# Altium PCB PDC.PcbDoc (part 2 of 3)
Units mil, origin at the board's own origin, x right, y up, seen from the top; angles counter-clockwise.
Board outline 5200.04 x 5000 mil, 4 copper layers (Top Layer, Signal Layer 1, Signal Layer 2, Bottom Layer), stack 30.634 mil thick; 172 components, 174 nets, 838 pads, 390 vias.
Unrouted connection lines stored in the file: 157.
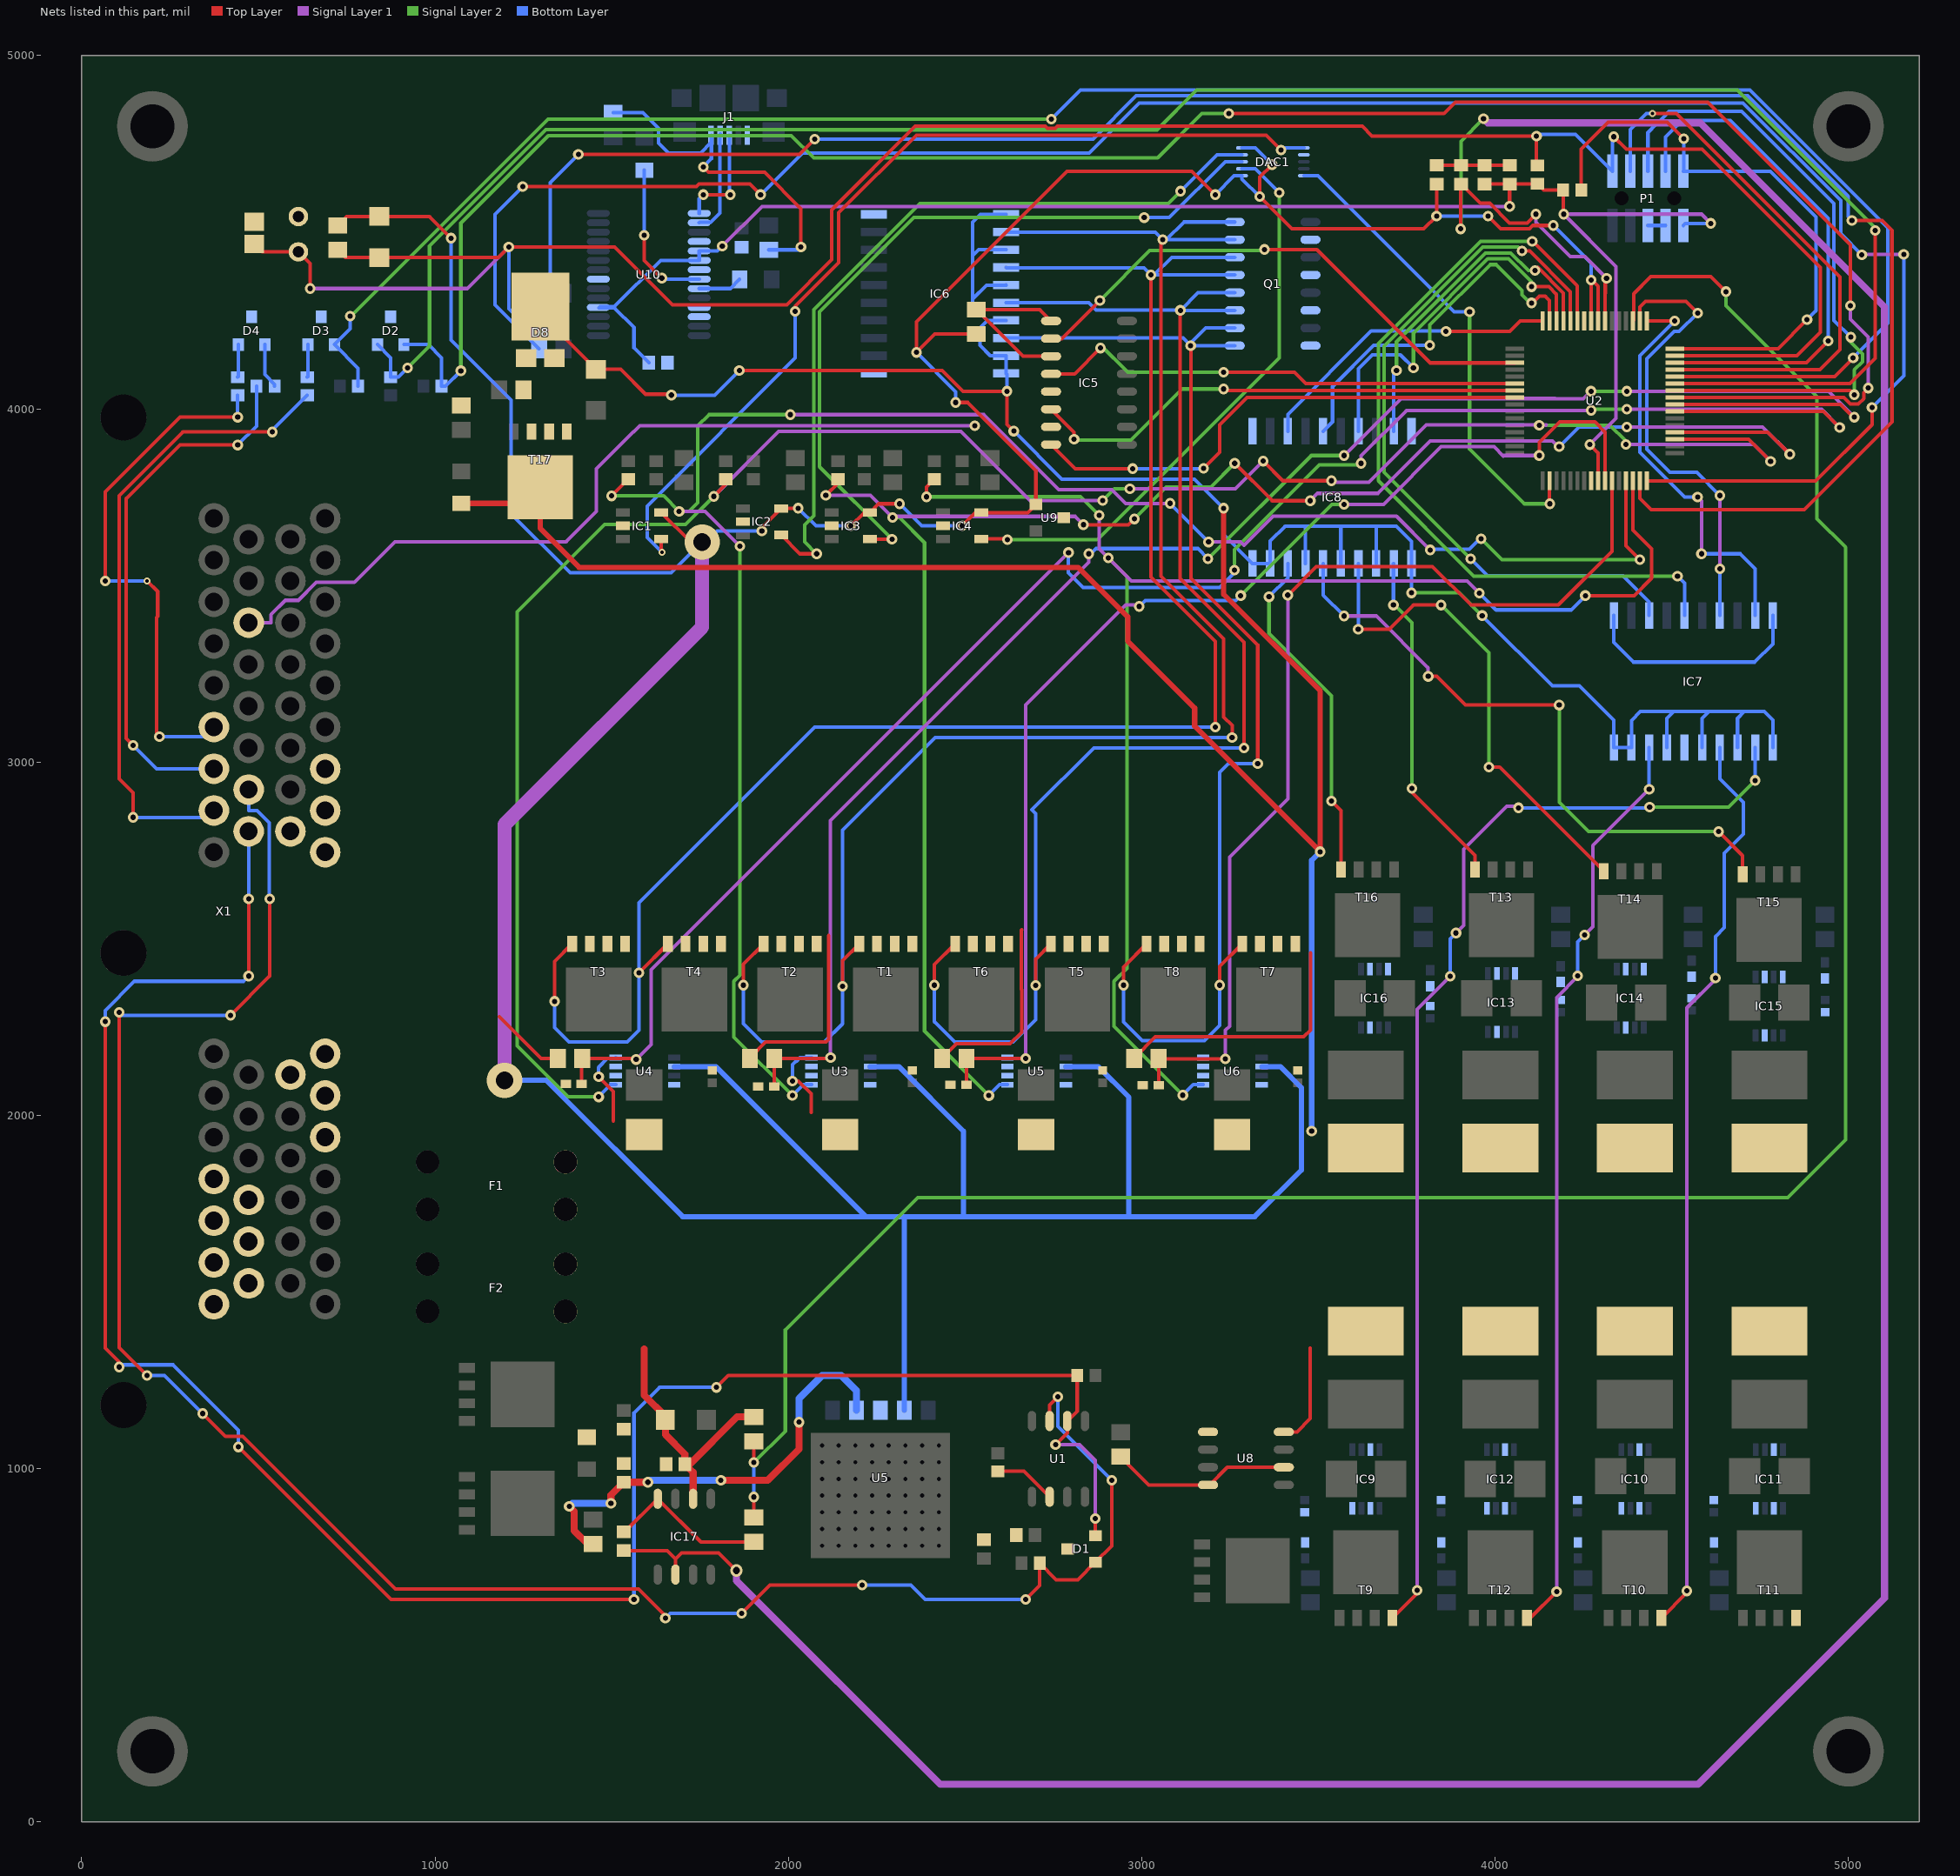
[diagram p4: the nets of this part, all layers, seen from the top]

## Via types
v1: diameter 30, hole 15, Top Layer to Bottom Layer, 376 vias
v2: diameter 96, hole 48, Top Layer to Bottom Layer, 6 vias
v3: diameter 20, hole 10, Top Layer to Bottom Layer, 3 vias
v4: diameter 100, hole 50, Top Layer to Bottom Layer, 2 vias
v5: diameter 96, hole 46, Top Layer to Bottom Layer, 1 vias
v6: diameter 35, hole 20, Top Layer to Bottom Layer, 1 vias
v7: diameter 40, hole 20, Top Layer to Bottom Layer, 1 vias

## Nets (pads, with @x,y where several pads share a name; then routed paths per layer and width w, separated by ;. In a path a pad name is that pad's centre, name@x,y a point inside that pad or via, vN(x,y) a via of type N, cw(c..) or ccw(c..) an arc to the next point about the centre after c; other vN are vias at no path point)
5VREF: C6.2 C22.2 IC17.6 U2.7 | length 10292.7
  Top Layer w10: C22.2@1534,768.1 1656.64,768.1 1680.26,744.48 ; IC17.6@1680.26,700.19 1680.26,744.48 ; v6(1852.96,711.65) 1802.59,762.01 1697.79,762.01 1680.26,744.48 ; v1(3902.26,4509.41) 3902.26,4635.63 C6.2@3903.16,4636.53 3957.58,4582.1 3984.98,4582.1 4040.72,4526.36 4090.65,4526.36 v1(4115.42,4551.13) ; U2.7@4311.42,4248.99 4311.42,4327.3 4311.73,4327.61 ; 4311.73,4327.3 4311.73,4327.61 ; v1@4316.21,4370.08 v1(4315.4,4369.27) 4311.73,4365.6 4311.73,4327.61
  Signal Layer 1 w10: v1(4115.42,4551.13) 4115.42,4527.99 4212.63,4430.78 4253.9,4430.78 v1(4315.4,4369.27)
  Signal Layer 1 w20: v6(1852.96,711.65) 1852.96,683.07 2429.61,106.42 4574.63,106.42 5102.09,633.88 5102.09,4288.05 4580.59,4809.56 3978.48,4809.56 v1(3966.93,4821.11)
  Signal Layer 2 w10: v1(3902.26,4509.41) 3903.39,4510.53 3903.39,4757.57 v1(3966.93,4821.11)
+5: C4.2 C19.2 D6.2 DAC1.1 DAC1.5 IC1.5 IC2.5 IC3.5 IC4.5 IC9.2 IC10.2 IC11.2 IC12.2 IC13.2 IC14.2 IC15.2 IC16.2 R16.2 R63.1 R65.2 U2.8 U2.9 U3.2 U4.2 U5.2 U5.4@2328.09,1164.95 U6.2 U9.1 | length 15112.1
  Top Layer w10: R65.2@724.37,4518.87 749.97,4544.46 D6.2@842.48,4544.46 984.3,4544.46 v1(1045.52,4483.24) ; IC1.5@1640.36,3706.47 1723.72,3623.1 v4(1755.74,3623.1) ; v1(1924.89,3654.59) 1924.89,3663.73 IC2.5@1979.25,3718.1 2027.16,3718.1 v1(2027.9,3718.84) ; v1(2176.77,3669.07) 2214.17,3706.47 IC3.5@2230.91,3706.47 2255.78,3731.34 v1(2314.57,3731.34) ; v1@2469.53,4018.06 v1(2473.57,4018.06) 2507.5,4018.06 2700.31,3825.25 U9.1@2700.31,3729.4 2677.38,3706.47 IC4.5@2545.87,3706.47 2529.13,3706.47 v1(2491.73,3669.07) ; R16.2@2532.01,4211.98 2414.37,4211.98 v1(2362.2,4159.81) 2362.2,4246.43 2788.51,4672.73 3141.4,4672.73 v1(3207.82,4606.3) ; v1(3368.8,4691.38) 3333.47,4656.04 v1(3333.47,4600.88) 3424.94,4509.41 3797.71,4509.41 v1(3834.26,4545.96) C4.2@3834.26,4636.53 ; v1(3979.76,4545.96) 4015.85,4509.86 4097.48,4509.86 4106.8,4519.18 v1(4164.97,4519.18) ; U2.9@4272.05,4248.99 v1(4272.05,4364.65) 4273.9,4364.65 4291.73,4346.82 U2.8@4291.73,4248.99
  Top Layer w20: v1(1379.63,893.21) 1393.64,879.2 1393.64,824.52 1431.36,786.8 R63.1@1446.99,786.8 ; v1(1497.74,901.96) 1497.74,925.34 C19.2@1534,961.61 v1(1602.33,961.61) ; v1(1808.94,967.04) 1941.7,967.04 2029.86,1055.2 v1(2029.86,1131.68)
  Signal Layer 1 w40: v4(1196.81,2099.3) 1196.81,2823.46 1755.74,3382.39 v4(1755.74,3623.1)
  Bottom Layer w10: v1(1045.52,4483.24) 1045.52,4194.53 1215.36,4024.69 1215.36,3702.64 1382.27,3535.73 1668.38,3535.73 v4(1755.74,3623.1) 1766.94,3623.1 1798.44,3654.59 v1(1924.89,3654.59) ; v1(1602.33,961.61) v1@1607.76,967.04 ; v1(2027.9,3718.84) 2077.67,3669.07 v1(2176.77,3669.07) ; v1(2314.57,3731.34) 2376.85,3669.07 v1(2491.73,3669.07) ; v1(2362.2,4159.81) 2473.57,4048.45 v1(2473.57,4018.06) ; v1(3207.82,4606.3) 3261.54,4660.02 DAC1.1@3283.58,4660.02 3283.58,4650.76 v1(3333.47,4600.88) ; DAC1.5@3283.58,4738.76 3321.42,4738.76 v1(3368.8,4691.38) ; v1(3834.26,4545.96) v1(3979.76,4545.96) ; v1(4164.97,4519.18) 4272.05,4412.11 v1(4272.05,4364.65)
  Bottom Layer w15: v4(1196.81,2099.3) 1314.92,2099.3 1700.89,1713.32 2219.52,1713.32 ; U4.2@1677,2138.09 1794.76,2138.09 2219.52,1713.32 ; U3.2@2231.12,2138.09 2312.72,2138.09 2495.39,1955.43 2495.39,1713.32 ; U5.4@2328.09,1164.95 2328.09,1713.32 ; U5.2@2785.25,2138.09 2876.82,2138.09 2963.14,2051.77 2963.14,1714.09 2962.38,1713.32 ; U6.2@3339.37,2138.09 3392.26,2138.09 3451.91,2078.44 3451.91,1967.46 ; 3451.89,1943.42 3451.89,1967.44 ; 3451.91,1943.4 3451.91,1845.27 3319.96,1713.32 2962.38,1713.32 ; 2219.52,1713.32 2328.09,1713.32 ; 2328.09,1713.32 2495.39,1713.32 ; 2495.39,1713.32 2962.38,1713.32
  Bottom Layer w20: v1(1379.63,893.21) 1388.38,901.96 v1(1497.74,901.96) ; v1@1607.76,967.04 v1(1808.94,967.04) ; v1(2029.86,1131.68) 2029.86,1198.69 2095.07,1263.9 2149.93,1263.9 2192.65,1221.18 U5.2@2192.65,1164.95
+12: "PTC Fuse1.2" "PTC Fuse2.2" "PTC Fuse3.2" "PTC Fuse4.2" "PTC Fuse5.2" "PTC Fuse6.2" "PTC Fuse7.2" "PTC Fuse8.2" C21.2 D5.1 D7.2 D8.3 F1.1 F2.1 IC6.11 IC6.13 IC6.15 IC6.17 IC6.19 IC6.20 IC7.11 IC7.13 IC7.15 IC7.17 IC7.19 IC7.20 IC8.11 IC8.13 IC8.15 IC8.17 IC8.19 IC8.20 IC17.2 LED2.1 R25.2 R28.2 R31.2 R34.2 R61.2 R64.1 T17.mb U3.8 U4.8 U5.8 U6.8 U8.4 U8.6 U8.8 | length 13081.2
  Top Layer w10: D8.3@1297.84,4289.53 1297.84,4269.49 D7.2@1455.32,4112.01 1525.11,4112.01 1595.62,4041.5 1666.34,4041.5 v1(1668.9,4038.94) ; v1(1463.06,2109.53) 1504.47,2068.12 1504.47,1984.55 ; v1(1861,4108.9) 2435.17,4108.9 2494.14,4049.92 v1(2618.44,4049.92) 2618.44,3956.36 v1(2637.8,3937.01) ; v1(2011.16,2096.99) 2028.09,2096.99 2064.13,2060.94 2064.13,2008.42 ; R64.1@2940.29,1033.89 3020.21,953.97 U8.4@3187.34,953.97 3191.99,953.97 3241.99,1003.97 U8.6@3401.91,1003.97 ; U8.8@3401.91,1103.97 3439.37,1103.97 3476.81,1141.41 3476.81,1341.63
  Top Layer w15: LED2.1@1074.41,3732.44 1252.56,3732.44 T17.mb@1297.84,3777.72 1297.84,3661.35 1407.9,3551.28 2820.24,3551.28 2960.27,3411.25 2960.27,3342.45 3149.61,3153.11 3149.61,3101.84 v1(3505.13,2746.32) 3505.13,3201.65 3231.52,3475.26 v1(3231.52,3718.84)
  Top Layer w20: 1592.28,1339.29 1591.88,1207.9 1651.72,1148.07 D5.1@1651.72,1138.18 1651.72,1096.19 1706.84,1041.07 C21.2@1706.84,1013.18 C21.2@1708.7,1011.32 ; IC17.2@1730.26,914.75 1730.26,989.75 C21.2@1708.7,1011.32 ; R61.2@1902.11,1146.45 1854.58,1146.45 1719.45,1011.32 C21.2@1708.7,1011.32
  Signal Layer 2 w10: v1(3763.2,3479.15) 3898.92,3479.15 v1(3963.29,3414.77)
  Bottom Layer w10: v1(1463.06,2109.53) 1463.06,2134.99 1462.09,2135.96 1487.49,2161.36 1508.89,2161.36 U4.8@1511.21,2163.68 ; v1(1668.9,4038.94) 1791.04,4038.94 v1(1861,4108.9) ; v1(2011.16,2096.99) 2011.16,2143.42 2020.49,2152.74 2022.14,2152.74 2033.08,2163.68 U3.8@2065.33,2163.68 ; IC6.17@2615.95,4250.43 2562.74,4250.43 ; IC6.15@2615.95,4350.43 2615.49,4349.97 2560.45,4349.97 2522.81,4312.33 2521.1,4312.33 ; IC6.13@2615.95,4450.43 2537.98,4450.43 2521.1,4433.56 ; IC6.11@2615.95,4550.43 2543.69,4550.43 2521.1,4527.84 2521.1,4433.56 ; v1(2618.44,4049.92) 2618.44,4097.94 IC6.20@2615.95,4100.43 IC6.19@2615.95,4150.43 2571.11,4150.43 2541.7,4179.84 2541.7,4229.39 2562.74,4250.43 ; v1(2637.8,3937.01) 2773.85,3800.96 3149.4,3800.96 v1(3231.52,3718.84) 3231.52,3644.18 IC8.20@3313.2,3562.5 IC8.19@3363.2,3562.5 3363.2,3625.75 3405.74,3668.3 3463.2,3668.3 ; IC8.17@3463.2,3562.5 3463.2,3668.3 ; IC8.15@3563.2,3562.5 3563.2,3668.3 ; IC8.13@3663.2,3562.5 3663.2,3667.47 3664.02,3668.3 ; v1(3763.2,3479.15) IC8.11@3763.2,3562.5 3763.2,3625.11 3720.01,3668.3 3664.02,3668.3 ; v1(3963.29,3414.77) 4161.99,3216.07 4238.7,3216.07 4335.93,3118.85 IC7.20@4335.93,3041.34 IC7.19@4385.93,3041.34 4385.93,3117.9 4411.23,3143.2 4505.22,3143.2 ; IC7.17@4485.93,3041.34 4485.93,3123.92 4505.22,3143.2 ; IC7.15@4585.93,3041.34 4585.93,3123.92 4605.22,3143.2 ; IC7.13@4685.93,3041.34 4685.93,3123.92 4705.22,3143.2 ; IC7.11@4785.93,3041.34 4785.93,3119.35 4762.09,3143.2 4705.22,3143.2 ; 2521.1,4312.33 2521.1,4433.56 ; 2521.1,4312.33 2521.1,4292.07 2562.74,4250.43 ; 3463.2,3668.3 3563.2,3668.3 ; 3563.2,3668.3 3664.02,3668.3 ; 4505.22,3143.2 4605.22,3143.2 ; 4605.22,3143.2 4705.22,3143.2
  Bottom Layer w15: v1(3480.89,1955.43) 3480.89,2722.08 v1(3505.13,2746.32)
BAT_SENSE: R61.1 R62.2 U2.3 | length 6768.8
  Top Layer w10: R62.2@1902.11,861.41 v1(1902.11,919.79) ; v1(1902.11,1017.43) R61.1@1902.11,1077.55 ; U2.3@4390.16,4248.99 4392.44,4251.27 4392.44,4325.83 4440.67,4374.07 4610.61,4374.07 4652.82,4331.85 v1(4653.01,4331.85)
  Signal Layer 2 w10: v1(1902.11,1017.43) 1991.33,1106.65 1991.33,1392.68 2365.68,1767.03 4828.12,1767.03 4991.64,1930.54 4991.64,3608.22 4911.01,3688.86 4911.01,4034.2 4653.01,4292.19 v1(4653.01,4331.85)
  Bottom Layer w10: v1(1902.11,919.79) v1(1902.11,1017.43)
CAN_N: D1.2 R13.1 U1.6 X1.A25 | length 6034.9
  Top Layer w10: v1(66.89,2265.37) 66.89,1340.86 106.26,1301.49 v1(106.26,1287.73) ; v1(443.39,1061.52) 874.99,629.92 v1(1562.96,629.92) ; v1(472.44,2394.49) v1(472.44,2613.19) ; v1(1796.24,1230.12) 1829.99,1263.86 R13.1@2817.34,1263.86 2817.34,1163.08 U1.6@2789.19,1134.93 2789.19,1101.62 v1(2755.91,1068.34) ; D1.2@2868.52,810.13 v1(2868.52,859.11)
  Signal Layer 1 w10: v1(2755.91,1068.34) 2824.04,1068.34 2868.52,1023.85 v1(2868.52,859.11)
  Bottom Layer w10: v1(66.89,2265.37) 66.89,2296.95 149.68,2379.73 457.69,2379.73 v1(472.44,2394.49) ; v1(106.26,1287.73) 112.43,1293.9 258.26,1293.9 443.39,1108.77 v1(443.39,1061.52) ; v1(472.44,2613.19) X1.A25@472.44,2804.18 ; v1(1562.96,629.92) 1562.96,1157.47 1635.6,1230.12 v1(1796.24,1230.12)
CAN_P: D1.1 R14.2 U1.7 X1.A24 | length 5878.1
  Top Layer w10: v1(106.26,2292.03) 106.26,1342.64 v1(185,1263.9) ; v1(342.48,1156.01) 406.97,1091.52 455.82,1091.52 473.39,1073.95 473.39,1073.74 887.21,659.92 1575.38,659.92 1651.72,583.59 v1(1651.72,577.07) ; v1(421.22,2283.46) 532.25,2394.49 v1(532.25,2613.19) ; v1(1867.42,590.55) 1947.22,670.34 v1(2208.39,670.34) ; v1(2671.36,629.92) 2711.04,669.6 R14.2@2711.04,732.7 2758.01,685.73 2818.93,685.73 D1.1@2868.52,735.32 2914.88,781.68 v1(2914.88,967.04) ; U1.7@2739.19,1134.93 2739.19,1180.25 v1(2762.2,1203.26)
  Bottom Layer w10: v1(106.26,2292.03) 114.83,2283.46 v1(421.22,2283.46) ; v1(185,1263.9) 234.6,1263.9 v1(342.48,1156.01) ; X1.A24@472.44,2922.29 472.44,2862.49 496.59,2862.49 530.75,2828.33 530.75,2614.69 v1(532.25,2613.19) ; v1(1651.72,577.07) 1665.2,590.55 v1(1867.42,590.55) ; v1(2208.39,670.34) 2346.16,670.34 2386.58,629.92 v1(2671.36,629.92) ; v1(2762.2,1203.26) 2762.2,1119.72 v1(2914.88,967.04)
CS: DAC1.10 U2.34 | length 1372.9
  Top Layer w10: U2.34@4153.94,3796.23 4153.94,3731.86 v1(4154.45,3731.34)
  Signal Layer 2 w10: v1(3927.57,4274.73) 3927.57,3886.44 4082.66,3731.34 v1(4154.45,3731.34)
  Bottom Layer w10: DAC1.10@3458.78,4660.02 3499.12,4660.02 3884.41,4274.73 v1(3927.57,4274.73)
D_IN_1: R18.2 X1.A33 | length 1840.6
  Top Layer w10: v1(145.63,2843.67) 145.63,2913.39 106.26,2952.76 106.26,3754.32 286.47,3934.53 v1(539.33,3934.53)
  Bottom Layer w10: v1(145.63,2843.67) 376.97,2843.67 385.28,2851.98 X1.A33@374.02,2863.24 ; v1(539.33,3934.53) 536.85,3937.01 R18.2@638.27,4038.43
D_IN_2: R20.2 X1.A32 | length 1528.7
  Top Layer w10: v1(145.63,3047.52) 126.26,3066.89 126.26,3746.04 277.87,3897.64 v1(441.42,3897.64)
  Bottom Layer w10: v1(145.63,3047.52) 211.81,2981.35 X1.A32@374.02,2981.35 ; v1(441.42,3897.64) 494.57,3950.79 R20.2@494.57,4064.02
D_IN_3: R17.2 X1.A31 | length 1517.5
  Top Layer w10: v1(66.89,3512.84) 66.89,3765.41 277.87,3976.38 v1(441.42,3976.38) ; v3(185,3512.84) 215,3482.84 215,3412.77 211.81,3409.57 211.81,3080.58 v1(220,3072.39)
  Bottom Layer w10: v1(66.89,3512.84) v3(185,3512.84) ; v1(220,3072.39) 346.95,3072.39 X1.A31@374.02,3099.46 ; v1(441.42,3976.38) R17.2@441.42,4038.43
D_N: J1.2 U10.16 | length 294.4
  Bottom Layer w10: U10.16@1747.53,4526.86 1749.3,4528.63 1780.45,4528.63 1805.95,4554.13 1805.95,4772.84 1807.56,4774.46 J1.2@1807.56,4778.12
D_OUT_1: D2.1 R22.1 U2.57 | length 5998.3
  Top Layer w10: v1(3246.18,4836.06) 3855.08,4836.06 3887.24,4868.22 4601.39,4868.22 5005.25,4464.36 v1(5005.25,4291.97) ; U2.57@4508.27,4032.45 4986.96,4032.45 5005.81,4013.6 5027.77,4013.6 5043.29,4029.12 5043.29,4046 v1(5056.14,4058.85)
  Signal Layer 1 w10: v1(5005.25,4291.97) 5005.25,4254.22 5056.14,4203.32 v1(5056.14,4058.85)
  Signal Layer 2 w10: v1(1072.98,4107.84) 1072.98,4526.32 1320.44,4773.78 2008.33,4773.78 2071.5,4710.61 3045.04,4710.61 3170.48,4836.06 v1(3246.18,4836.06)
  Bottom Layer w10: D2.1@911.89,4182.13 980.79,4182.13 1018.19,4144.73 R22.1@1018.19,4064.02 1029.16,4064.02 v1(1072.98,4107.84)
D_OUT_2: D2.2 R19.1 U2.59 | length 5939.8
  Top Layer w10: U2.59@4508.27,4071.82 5004.02,4071.82 5075.46,4143.27 v1(5075.46,4505)
  Signal Layer 2 w10: v1(922.41,4115.68) 984.3,4177.57 984.3,4460.97 1313.61,4790.28 2085.74,4790.28 2086.09,4789.93 3043.09,4789.93 3155.72,4902.56 4685.69,4902.56 5075.46,4512.79 v1(5075.46,4505)
  Bottom Layer w10: D2.2@837.09,4182.13 874.49,4144.73 R19.1@874.49,4089.61 896.34,4089.61 v1(922.41,4115.68)
D_OUT_3: D3.1 R21.1 U2.60 | length 5959.7
  Top Layer w10: U2.60@4508.27,4091.51 4961.45,4091.51 5013.18,4143.24 v1(5013.18,4144.33)
  Signal Layer 2 w10: v1(759.63,4262.7) 762.69,4262.7 1320.34,4820.35 v1(2743.9,4820.35)
  Bottom Layer w10: v1(759.63,4262.7) 759.63,4226.72 D3.1@715.04,4182.13 781.97,4115.2 R21.1@781.97,4064.02 ; v1(2743.9,4820.35) 2826.11,4902.56 4721.22,4902.56 5111.71,4512.07 5111.71,4242.86 v1(5013.18,4144.33)
D_OUT_4: D3.2 R18.1 | length 93.3
  Bottom Layer w10: R18.1@638.27,4089.61 640.24,4091.58 D3.2@640.24,4182.13
D_OUT_5: D4.1 R20.1 | length 129.5
  Bottom Layer w10: D4.1@518.19,4182.13 518.19,4097.04 545.75,4069.49 R20.1@545.75,4064.02
D_OUT_6: D4.2 R17.1 | length 93.3
  Bottom Layer w10: R17.1@441.42,4089.61 443.39,4091.58 D4.2@443.39,4182.13
D_P: J1.3 U10.15 | length 303.9
  Top Layer w10: v1(1758.96,4606.3) v1(1835.95,4606.3)
  Bottom Layer w10: U10.15@1747.53,4553.48 1747.53,4594.87 v1(1758.96,4606.3) ; J1.3@1833.15,4774.46 1833.15,4609.09 v1(1835.95,4606.3)
DGND: C1.1 C2.1 C3.1 C4.1 C5.1 C6.1 C7.1 C8.1 C9.1 C10.1 C11.1 C12.1 C13.1 C14.1 C15.1 C16.1 C17.1 C18.1 C19.1 C20.1 C21.1 C22.1 C23.1 C25.1 C26.1 D1.3 D2.3 D3.3 D4.3 D8.1 D8.2 DAC1.7 IC1.2 IC2.2 IC3.2 IC4.2 IC6.1 IC6.10 IC7.1 IC7.10 IC8.1 IC8.10 IC9.4 IC9.7 IC10.4 IC10.7 IC11.4 IC11.7 IC12.4 IC12.7 IC13.4 IC13.7 IC14.4 IC14.7 IC15.4 IC15.7 IC16.4 IC16.7 IC17.4 J1.5 LED1.2 P1.3 P1.5 Q1.10 Q1.12 Q1.14 Q1.16 R15.1 R27.1 R30.1 R33.1 R36.1 R39.1 R42.1 R45.1 R48.1 R51.1 R54.1 R57.1 R60.1 R62.1 R66.1 R67.1 T17.1 T17.2 T17.3 U1.2 U2.10 U2.40 U3.4 U3.6 U3.7 U4.4 U4.6 U4.7 U5.3@2260.37,1164.95 U5.4@2785.25,2086.91 U5.6@2619.46,2112.5 U5.7 U6.4 U6.6 U6.7 U8.1 U9.3 U10.7 U10.18 U10.21 U10.25 U10.26 W1.1 X1.B17 X1.B18 X1.B19 X1.B23 X1.B24 X1.B25 X1.B26 | length 1543.6
  Top Layer w10: T17.3@1268,3925.04 T17.3@1268,3926.57 ; C22.1@1534,821.25 1536.76,821.25 IC17.4@1630.26,914.75 1752.5,792.51 R62.1@1902.11,792.51 ; R15.1@2592.93,992.21 2593.46,992.74 2666.81,992.74 U1.2@2739.19,920.36 ; C4.1@3834.26,4689.68 C6.1@3903.16,4689.68 C3.1@3970.44,4689.68 C5.1@4040.95,4689.68
  Bottom Layer w10: IC7.1@4335.93,3415.36 4335.93,3338.95 4391.59,3283.29 4734.5,3283.29 4785.93,3334.72 IC7.10@4785.93,3415.36 ; P1.5@4432.32,4519.18 P1.3@4482.32,4519.18
DVCC: C3.2 C5.2 C25.2 P1.1 R23.2 R24.2 U2.41 U10.4 U10.19 U10.20 | length 4677.7
  Top Layer w10: C3.2@3970.44,4636.53 C5.2@4040.95,4636.53 ; v1@4040.95,4572.86 v1(4040.95,4573.2) C5.2@4040.95,4636.53 ; v1(4194.1,4551.13) 4192.53,4552.7 R23.2@4192.53,4619.58 4137.63,4619.58 R24.2@4119.7,4637.51 4118.71,4636.53 C5.2@4040.95,4636.53 ; v1(4268.12,3898.88) 4291.73,3875.27 U2.41@4291.73,3796.23
  Signal Layer 1 w10: v1(1812.78,4460.86) 1925.12,4573.2 v1(4040.95,4573.2) ; v1(4268.12,3898.88) 4341.9,3972.67 4341.9,4403.33 v1(4194.1,4551.13) 4584.31,4551.13 v1(4610.32,4525.12)
  Bottom Layer w10: C25.2@1605.01,4130.29 1562.96,4172.34 1562.96,4230.1 1507.49,4285.56 1463.86,4285.56 1467.41,4289.11 1507.49,4289.11 1638.79,4420.41 U10.20@1747.53,4420.41 U10.19@1747.53,4447.02 1798.94,4447.02 v1(1812.78,4460.86) ; P1.1@4532.32,4519.18 4538.25,4525.12 v1(4610.32,4525.12)
DVCC_5V: J1.1 R70.2 R71.2 | length 989.5
  Top Layer w10: v1(1758.96,4685.04) 1774.52,4669.48 1932.84,4669.48 2035.4,4566.93 v1(2035.4,4458.04)
  Bottom Layer w10: R71.2@1504.06,4838.18 1588.6,4838.18 1632.8,4793.98 1632.8,4752.12 1660.52,4724.41 1751.29,4724.41 J1.1@1781.97,4755.09 ; v1(1758.96,4685.04) 1781.97,4708.05 J1.1@1781.97,4755.09 ; J1.1@1781.97,4774.46 J1.1@1781.97,4755.09 ; R70.2@1944.57,4450.17 2027.52,4450.17 v1(2035.4,4458.04)
EMERGENCY_SHUTDOWN: IC5.9 IC5.11 IC5.13 IC5.15 R16.1 X1.A20 | length 2861
  Top Layer w10: IC5.11@2743.37,4148.88 2664,4148.88 R16.1@2532.01,4280.88 2711.37,4280.88 IC5.9@2743.37,4248.88
  Signal Layer 1 w10: X1.A20@472.44,3394.73 535.75,3394.73 535.75,3417.43 576.35,3458.04 613.25,3458.04 663.81,3508.59 771.43,3508.59 886.68,3623.85 1370.83,3623.85 1456.58,3709.61 1456.58,3830.26 1561.58,3935.26 1562.31,3934.53 1580.04,3952.25 v1(2527.28,3952.25)
FTDI_GREEN: D9.2 U10.23 | length 125.1
  Bottom Layer w10: U10.23@1747.53,4340.56 1835.95,4340.56 D9.2@1861.89,4366.51
FTDI_RED: D10.2 U10.22 | length 433.4
  Top Layer w10: v1(1591.8,4491.29) 1591.8,4419.98 v1(1641.7,4370.08)
  Bottom Layer w10: v1(1591.8,4491.29) 1592.21,4491.71 D10.2@1592.21,4675.56 ; v1(1641.7,4370.08) 1644.6,4367.18 U10.22@1747.53,4367.18
FTDI_RX: R69.2 U2.47 | length 5837.5
  Top Layer w10: v1(1405.48,4720.64) 2031.63,4720.64 v1(2074.77,4763.78) ; U2.47@4409.84,3796.23 4409.84,3746.37 4441.11,3715.1 4874.9,3715.1 5122.94,3963.15 5122.94,4505.39 5094.71,4533.62 v1(5009.78,4533.62)
  Bottom Layer w10: R69.2@1294.41,4327.14 1325.67,4358.4 1325.67,4640.84 v1(1405.48,4720.64) ; v1(2074.77,4763.78) 2862.17,4763.78 2984.45,4886.06 4714.38,4886.06 4998.82,4601.62 4998.82,4544.58 v1(5009.78,4533.62)
FTDI_TX: R68.2 U2.48 | length 6030.3
  Top Layer w10: v1(1248,4628.91) 1739.15,4628.91 1746.53,4636.3 1891.24,4636.3 v1(1921.24,4606.3) ; U2.48@4429.53,3796.23 4907.37,3796.23 5066.46,3955.33 v1(5066.46,4003.84)
  Signal Layer 1 w10: v1(5037.86,4435.99) 5038.78,4436.91 v1(5156.31,4436.91)
  Bottom Layer w10: v1(1248,4628.91) 1169.26,4550.17 1169.26,4294.82 R68.2@1294.41,4169.66 ; v1(1921.24,4606.3) 2039.35,4724.41 2851.08,4724.41 2992.73,4866.06 4701.79,4866.06 4977.88,4589.97 4977.88,4495.96 v1(5037.86,4435.99) ; v1(5066.46,4003.84) 5156.31,4093.69 v1(5156.31,4436.91)
HC1_ANALOG_BACKUP_REF: DAC1.2 IC4.4 | length 1658.6
  Top Layer w10: IC4.4@2545.87,3631.66 2617.43,3631.66 v1(2619.46,3629.64)
  Signal Layer 2 w10: v1(2619.46,3629.64) 2874.89,3629.64 3389.02,4143.76 v1(3389.02,4611.91)
  Bottom Layer w10: DAC1.2@3283.58,4679.7 3321.23,4679.7 v1(3389.02,4611.91)
HC1_EN: IC5.16 U2.24 | length 1469.4
  Top Layer w10: IC5.16@2743.37,3898.88 2811.46,3830.79 v1(2974.06,3830.79) ; v1(3175.16,3831.9) 3220.3,3877.04 3220.3,3954.82 3297.94,4032.45 U2.24@4055.51,4032.45
  Bottom Layer w10: v1(2974.06,3830.79) 3174.04,3830.79 v1(3175.16,3831.9)
HC1_GATE: IC6.18 Q1.1 Q1.2 T7.4 T8.4 | length 3591.5
  Top Layer w10: v1(2948.07,2368.7) 2948.07,2420.13 T8.4@3013.47,2485.53 ; v1(3138.42,4178.91) 3139.69,4177.64 3139.69,3520.08 3328.09,3331.68 v1(3328.09,2995.64) ; v1(3220.57,2368.7) 3220.57,2421.73 T7.4@3284.37,2485.53
  Bottom Layer w10: IC6.18@2615.95,4200.43 3116.9,4200.43 v1(3138.42,4178.91) 3138.42,4186.67 3180.66,4228.91 Q1.2@3262.91,4228.91 ; v1(2948.07,2368.7) 2948.07,2264.25 3000.85,2211.47 3177.44,2211.47 3220.57,2254.6 v1(3220.57,2368.7) 3220.57,2970.94 3245.28,2995.64 v1(3328.09,2995.64) ; v1@3152.32,4178.91 Q1.1@3262.91,4178.91
HC1_ISENSE_ADC: R12.1 U2.46 U6.5 | length 4342.3
  Top Layer w10: v1(2390.53,3751.05) 2390.53,3778.49 R12.1@2413,3800.96 ; v1(4255.27,3471.41) 4393.64,3471.41 4443.02,3520.79 4443.02,3604.09 4390.16,3656.95 U2.46@4390.16,3796.23
  Signal Layer 1 w10: v1(2879.68,3698.29) 2879.68,3603.57 v1(2905.19,3578.06) 2970.41,3512.84 3920.8,3512.84 v1(3955.24,3478.4)
  Signal Layer 2 w10: v1(2390.53,3751.05) 2826.91,3751.05 v1(2879.68,3698.29) ; v1(2905.19,3578.06) 2957.94,3525.32 2957.94,2416.04 2921.57,2379.68 2921.57,2251.94 v1(3116.27,2057.24)
  Bottom Layer w10: v1(3116.27,2057.24) 3145.94,2086.91 U6.5@3173.58,2086.91 ; v1(3955.24,3478.4) 4002.74,3430.9 4214.76,3430.9 v1(4255.27,3471.41)
HC1_VSENSE_ADC: R35.1 R36.2 U2.43 | length 2911.3
  Top Layer w10: R36.2@3047.92,2085.3 R35.1@3047.92,2161.25 3049.44,2162.78 3052.45,2159.77 v1(3236.79,2159.77) ; v1(3413.2,3472.75) 3493.7,3553.25 3822.82,3553.25 3931.42,3444.65 4178.75,3444.65 4331.1,3597.01 U2.43@4331.1,3796.23
  Signal Layer 1 w10: v1(3236.79,2159.77) 3236.79,2240.76 3248.53,2252.5 3248.53,2731.36 3413.2,2896.03 v1(3413.2,3472.75)
HC2_ANALOG_BACKUP_REF: DAC1.3 IC3.4 | length 2162.3
  Top Layer w10: IC3.4@2230.91,3631.66 2231.62,3630.95 v1(2293.08,3630.95)
  Signal Layer 2 w10: v1(2293.08,3630.95) 2088.09,3835.94 2088.09,4274.33 2355.16,4541.41 v1(3006.87,4541.41)
  Bottom Layer w10: v1(3006.87,4541.41) 3077.94,4541.41 3235.91,4699.39 DAC1.3@3283.58,4699.39
HC2_EN: IC5.14 U2.23 | length 1423
  Top Layer w10: IC5.14@2743.37,3998.88 2808.51,3933.74 v1(2808.51,3914.27) ; v1(3231.52,4056.21) 3235.59,4052.14 U2.23@4055.51,4052.14
  Signal Layer 2 w10: v1(2808.51,3914.27) 2808.51,3911.47 2969.12,3911.47 3113.86,4056.21 v1(3231.52,4056.21)
HC2_GATE: IC6.16 Q1.3 Q1.4 T5.4 T6.4 | length 4132.6
  Top Layer w10: v1(2412.69,2368.7) 2412.69,2426.56 T6.4@2471.66,2485.53 ; v1(2699.46,2367.62) 2699.46,2442.42 T5.4@2742.57,2485.53 ; v1(3109.24,4278.91) 3108.42,4278.09 3108.42,3519.95 3289.37,3339 v1(3289.37,3040.4)
  Bottom Layer w10: v1(2412.69,2368.7) 2412.69,2265.25 2470.47,2207.47 2635.88,2207.47 2699.46,2271.05 v1(2699.46,2367.62) 2699.46,2854.65 2689.19,2864.91 2864.68,3040.4 v1(3289.37,3040.4) ; IC6.16@2615.95,4300.43 2850.01,4300.43 2870.37,4280.08 3108.07,4280.08 v1(3109.24,4278.91) ; Q1.3@3262.91,4278.91 v1(3109.24,4278.91) ; Q1.4@3262.91,4328.91 3159.24,4328.91 v1(3109.24,4278.91)
HC2_ISENSE_ADC: R9.1 U2.52 U5.5@2619.46,2086.91 | length 5250.2
  Top Layer w10: v1(2105.79,3755.63) 2140.36,3790.2 R9.1@2140.36,3800.96 ; v1(2834.65,3672.31) 2835.17,3671.79 2962.43,3671.79 v1(2979.02,3688.38) ; v1(3262.91,3845.82) 3368.8,3739.93 v1(3476.96,3739.93) ; U2.52@4508.27,3934.03 4771.44,3934.03 v1(4833.84,3871.63)
  Signal Layer 1 w10: v1(2105.79,3755.63) 2231.5,3755.63 v1(2294.88,3692.24) 2298.2,3695.57 2811.39,3695.57 v1(2834.65,3672.31) ; v1(3476.96,3739.93) 3497.92,3760.89 3668.16,3760.89 3816.69,3909.42 4161.96,3909.42 4178.5,3892.89 v1(4181.33,3892.89) ; v1(4372.75,3948.88) 4756.59,3948.88 v1(4833.84,3871.63)
  Signal Layer 2 w10: v1(2294.88,3692.24) 2314.6,3692.24 2385.21,3621.63 2385.21,2238.21 v1(2567.27,2056.15) ; v1(2979.02,3688.38) 3069.13,3778.49 3195.59,3778.49 v1(3262.91,3845.82)
  Bottom Layer w10: v1(2567.27,2056.15) 2598.03,2086.91 U5.5@2619.46,2086.91 ; v1(4181.33,3892.89) 4237.32,3948.88 v1(4372.75,3948.88)
HC2_VSENSE_ADC: R32.1 R33.2 U2.42 | length 3421.1
  Top Layer w10: R33.2@2503.96,2086.61 R32.1@2503.96,2161.25 2671.19,2161.25 v1(2671.36,2161.08) ; v1(4124.82,3867.89) 4124.82,3905.58 4182.76,3963.53 4282.23,3963.53 4311.42,3934.34 U2.42@4311.42,3796.23
  Signal Layer 1 w10: v1(2671.36,2161.08) 2671.36,3162 2954.01,3444.65 2996.32,3444.65 v1(2992.37,3440.7) ; v1(3572.2,3729.4) 3684.02,3729.4 3847.54,3892.92 3996.77,3892.92 4023.27,3866.42 4024.74,3867.89 v1(4124.82,3867.89)
  Signal Layer 2 w10: v1(3279.96,3471.41) 3538.37,3729.82 3572.2,3729.82 v1(3572.2,3729.4)
  Bottom Layer w10: v1(2992.37,3440.7) 3009.44,3457.77 3266.31,3457.77 v1(3279.96,3471.41)
HC3_ANALOG_BACKUP_REF: DAC1.4 IC2.4 | length 2232.4
  Top Layer w10: IC2.4@1979.25,3643.3 2032.85,3589.7 v1(2079.86,3589.7)
  Signal Layer 2 w10: v1(2079.86,3589.7) 2045.87,3623.69 2045.87,3671.3 2071.59,3697.02 2071.59,4281.17 2371.76,4581.34 3074.84,4581.34 v1(3109.75,4616.25)
  Bottom Layer w10: v1(3109.75,4616.25) 3212.57,4719.07 DAC1.4@3283.58,4719.07
HC3_EN: IC5.12 U2.22 | length 1396
  Top Layer w10: IC5.12@2743.37,4098.88 2809.98,4098.88 v1(2883.3,4172.2) ; v1(3231.52,4103.64) 3432.18,4103.64 3464,4071.82 U2.22@4055.51,4071.82
  Signal Layer 2 w10: v1(2883.3,4172.2) 2883.3,4180.61 2960.27,4103.64 v1(3231.52,4103.64)
HC3_GATE: IC6.14 Q1.5 Q1.6 T3.4 T4.4 | length 5099.9
  Top Layer w10: v1(1338.08,2322.83) 1338.08,2435.56 T3.4@1388.06,2485.53 ; v1(1577.43,2404) T4.4@1658.96,2485.53 ; v1(3026.09,4378.91) 3026.09,3523.6 3207.82,3341.87 v1(3207.82,3099.46)
  Bottom Layer w10: v1(1338.08,2322.83) 1338.08,2248.81 1379.36,2207.54 1544.04,2207.54 1577.43,2240.92 v1(1577.43,2404) 1577.43,2602.12 2074.77,3099.46 v1(3207.82,3099.46) ; IC6.14@2615.95,4400.43 2617.67,4398.72 3006.29,4398.72 v1(3026.09,4378.91) v1@3034.93,4378.91 ; Q1.5@3262.91,4378.91 v1@3034.93,4378.91 ; Q1.6@3262.91,4428.91 3084.93,4428.91 v1@3034.93,4378.91
HC3_ISENSE_ADC: R6.1 U2.51 U4.5 | length 6006.8
  Top Layer w10: v1(1788.67,3752.24) 1822.44,3786.02 R6.1@1822.44,3800.96 ; v1(3343.78,3852.14) 3399.4,3796.53 v1(3536.7,3796.53) ; U2.51@4508.27,3914.34 4716.9,3914.34 v1(4779.56,3851.69)
  Signal Layer 1 w10: v1(1788.67,3752.24) 1972.18,3935.75 2488.06,3935.75 2683.66,3740.16 v1(2889.22,3740.16) ; v1(2966.34,3773.4) 3265.04,3773.4 v1(3343.78,3852.14) ; v1(3536.7,3796.53) 3540.82,3792.4 3642.21,3792.4 3804.62,3954.82 4144.69,3954.82 4143.59,3953.71 v1(4124.82,3953.71) ; v1(4370.08,3899.11) 4732.13,3899.11 v1(4779.56,3851.69)
  Signal Layer 2 w10: v1(1463.06,2052.46) 1376.94,2052.46 1232.92,2196.48 1232.92,3425.76 1479.47,3672.31 1708.74,3672.31 v1(1788.67,3752.24) ; v1(2889.22,3740.16) 2922.46,3773.4 v1(2966.34,3773.4) ; v1(4124.82,3953.71) 4324.96,3953.71 4370.08,3908.59 v1(4370.08,3899.11)
  Bottom Layer w10: v1(1463.06,2052.46) 1497.51,2086.91 U4.5@1511.21,2086.91
HC3_VSENSE_ADC: R29.1 R30.2 U2.55 | length 5191.8
  Top Layer w10: R30.2@1415,2089.62 1415,2160.19 R29.1@1416.06,2161.25 1566.1,2161.25 v1(1569.1,2158.24) ; U2.55@4508.27,3993.08 4929.4,3993.08 v1(4975.08,3947.4)
  Signal Layer 1 w10: v1(1569.1,2158.24) 1611.88,2201.02 1611.88,2412.62 2661.22,3461.96 v1(2792.57,3593.31) ; v1(3620.26,3845.82) 3620.26,3866.96 3749.17,3995.87 v1(4272.05,3995.87) ; v1(4372.75,3998.88) 4923.6,3998.88 v1(4975.08,3947.4)
  Signal Layer 2 w10: v1(3262.27,3543.31) 3262.27,3601.14 3502.52,3841.39 3615.83,3841.39 v1(3620.26,3845.82) ; v1(4272.05,3995.87) 4275.06,3998.88 v1(4372.75,3998.88)
  Bottom Layer w10: v1(2792.57,3593.31) 2792.57,3536.07 2834.21,3494.42 3220.8,3494.42 3262.27,3535.89 v1(3262.27,3543.31)
HC4_ANALOG_BACKUP_REF: DAC1.6 IC1.4 | length 2673.3
  Top Layer w10: IC1.4@1640.36,3631.66 1640.36,3591.67 v3(1642.46,3593.77) ; v1(2019.14,4276.09) 2019.14,4290.23 2142.64,4413.73 2142.64,4555.15 2361.94,4774.46 3352.23,4774.46 v1(3393.68,4733.01)
  Bottom Layer w10: v3(1642.46,3593.77) 1600.08,3636.15 1600.08,3724.9 2019.14,4143.96 v1(2019.14,4276.09) ; v1(3393.68,4733.01) 3399.66,4738.99 DAC1.6@3458.78,4738.99
HC4_EN: IC5.10 U2.19 | length 1549
  Top Layer w10: IC5.10@2743.37,4198.88 2773.65,4198.88 v1(2881.34,4306.58) ; v1(3347.09,4451.27) 3495.55,4451.27 3816.69,4130.14 U2.19@4054.77,4130.14
  Signal Layer 2 w10: v1(2881.34,4306.58) 3022.73,4447.97 3343.78,4447.97 v1(3347.09,4451.27)
HC4_GATE: IC6.12 Q1.7 Q1.8 T1.4 T2.4 | length 4837.6
  Top Layer w10: v1(1872.46,2368.7) 1872.46,2428.13 T2.4@1929.86,2485.53 ; v1(2153.51,2365.45) 2153.51,2438.28 T1.4@2200.76,2485.53 ; v1(3059.51,4478.91) 3053.92,4473.32 3053.92,3526.32 3231.52,3348.72 3231.52,3127.97 3255.63,3103.86 v1(3255.63,3069.46)
  Bottom Layer w10: v1(1872.46,2368.7) 1872.46,2259.61 1924.53,2207.54 2101.98,2207.54 2153.51,2259.06 v1(2153.51,2365.45) 2153.51,2807.35 2415.62,3069.46 v1(3255.63,3069.46) ; IC6.12@2615.95,4500.43 3037.99,4500.43 v1(3059.51,4478.91) v1@3069.54,4478.91 ; Q1.7@3262.91,4478.91 v1@3069.54,4478.91 ; Q1.8@3262.91,4528.91 3119.54,4528.91 v1@3069.54,4478.91
HC4_ISENSE_ADC: R3.1 U2.45 U3.5 | length 5654.2
  Top Layer w10: v1(1499.55,3753.66) R3.1@1546.85,3800.96 ; U2.45@4370.47,3796.23 4370.47,3612.54 v1(4409.74,3573.27)
  Signal Layer 1 w10: v1(1690.75,3709.61) 1763.82,3709.61 v1(1862.52,3610.9) ; v1(2005.13,3983.6) 2552.87,3983.6 2765.07,3771.4 2915.05,3771.4 2954.01,3732.44 v1(3080.42,3732.44) ; v1(3188.98,3623.1) 3279.96,3623.1 3289.37,3613.68 3371.62,3695.93 3720.82,3695.93 v1(3816.13,3600.62)
  Signal Layer 2 w10: v1(1499.55,3753.66) 1646.69,3753.66 v1(1690.75,3709.61) 1718.71,3709.61 1743.54,3734.44 1743.54,3952.25 1774.88,3983.6 v1(2005.13,3983.6) ; v1(1862.52,3610.9) 1862.52,2396.24 1845.96,2379.68 1845.96,2221.43 v1(2011.16,2056.23) ; v1(3960.35,3632.4) 4019.48,3573.27 v1(4409.74,3573.27)
  Bottom Layer w10: v1(2011.16,2056.23) 2041.84,2086.91 U3.5@2065.33,2086.91 ; v1(3080.42,3732.44) 3188.98,3623.89 v1(3188.98,3623.1) ; v1(3816.13,3600.62) 3817.7,3602.19 3927.21,3602.19 3960.35,3635.33 v1(3960.35,3632.4)
HC4_VSENSE_ADC: R26.1 R27.2 U2.56 | length 4916.9
  Top Layer w10: R27.2@1960.18,2081.99 1960.18,2161.08 R26.1@1960.01,2161.25 2116.8,2161.25 v1(2119.23,2163.68) ; U2.56@4508.27,4012.77 4977.42,4012.77 5016.79,3973.4 v1(5016.79,3976.42)
  Signal Layer 1 w10: v1(2119.23,2163.68) 2119.23,2834.74 2850.01,3565.52 v1(2850.01,3589.7) ; v1(3572.2,3867.89) 3733.43,4029.12 4169.85,4029.12 4170.35,4028.62 4249.96,4028.62 v1(4271.27,4049.92) ; v1(4372.75,4049.92) 4943.28,4049.92 v1(5016.79,3976.42)
  Signal Layer 2 w10: v1(3187.34,3575.69) 3479.54,3867.89 v1(3572.2,3867.89) ; v1(4271.27,4049.92) v1(4372.75,4049.92)
  Bottom Layer w10: v1(2850.01,3589.7) 2850.01,3583.62 2870.96,3604.56 3158.47,3604.56 v1(3187.34,3575.69)
HC_1_OUTPUT: R35.2 T7.1 T7.2 T7.3 T8.1 T8.2 T8.3 X1.A7 X1.A8 | length 750.5
  Top Layer w10: R35.2@2979.02,2161.25 2979.02,2162.78 3038.74,2222.5 3458.1,2222.5 3477.19,2241.59 3477.19,2459.69
HC_2_OUTPUT: R32.2 T5.1 T5.2 T5.3 T6.1 T6.2 T6.3 X1.A9 X1.A17 | length 546.6
  Top Layer w10: R32.2@2435.07,2161.25 2435.07,2162.78 2475.11,2202.83 2627.44,2202.83 2659.86,2235.24 2659.86,2355.6 2659.19,2356.27 2659.19,2524.23 2659.86,2524.9
HC_3_OUTPUT: R29.2 T3.1 T3.2 T3.3 T4.1 T4.2 T4.3 X1.B2 X1.B3 | length 214.3
  Top Layer w10: 1181.96,2279.69 1300.4,2161.25 R29.2@1347.16,2161.25
HC_4_OUTPUT: R26.2 T1.1 T1.2 T1.3 T2.1 T2.2 T2.3 X1.B1 X1.B8 | length 539.9
  Top Layer w10: R26.2@1891.11,2161.25 1891.11,2162.78 1935.87,2207.54 2106.45,2207.54 2114.14,2215.22 2114.14,2508.88
JTAG_RST: C23.2 C24.2 D6.1 P1.10 R24.1 R65.1 U2.63 W1.2 | length 6740.8
  Top Layer w10: C23.2@488.15,4466.71 510.4,4444.46 W1.2@613.16,4444.46 646.15,4411.48 v1(646.15,4340.56) ; R65.1@724.37,4449.97 746.02,4428.32 D6.1@842.48,4428.32 1178.91,4428.32 v1(1208.63,4458.04) 1508.67,4458.04 1671.9,4294.82 1995.45,4294.82 2122.64,4422.01 2122.64,4563.43 2359.2,4800 2726.77,4800 2732.93,4793.85 2754.88,4793.85 2761.03,4800 3623.96,4800 3651.59,4772.37 v1(4117.01,4772.37) 4117.01,4691.38 R24.1@4119.7,4688.69 ; v1(4335.93,4770.25) 4371.21,4734.97 4585.52,4734.97 4920.57,4399.93 4920.57,4217.07 4854.06,4150.56 U2.63@4508.27,4150.56
  Signal Layer 1 w10: v1(646.15,4340.56) 1091.15,4340.56 v1(1208.63,4458.04)
  Bottom Layer w10: v1(1208.63,4458.04) 1208.63,4283.73 1243.96,4248.4 C24.2@1302.29,4248.4 ; v1(4117.01,4772.37) 4121.86,4777.22 4227.83,4777.22 P1.10@4332.32,4672.73 4332.32,4766.64 v1(4335.93,4770.25)
JTAG_TCLK: P1.4 U2.62 | length 1497.1
  Top Layer w10: U2.62@4508.27,4130.88 4880.73,4130.88 v1(4942.32,4192.47)
  Bottom Layer w10: P1.4@4482.32,4672.73 4482.32,4769.52 4528.77,4815.97 4665.84,4815.97 4942.32,4539.49 v1(4942.32,4192.47)
JTAG_TDI: P1.8 U2.61 | length 1618.6
  Top Layer w10: v3(4444.98,4836.06) 4512.72,4836.06 4975.91,4372.86 4975.91,4167.4 4919.71,4111.19 U2.61@4508.27,4111.19
  Bottom Layer w10: P1.8@4382.32,4672.73 4382.32,4790.63 4427.75,4836.06 v3(4444.98,4836.06)
JTAG_TDO: P1.6 U2.58 | length 1868.3
  Top Layer w10: U2.58@4508.27,4052.14 5004.75,4052.14 v1(5016.79,4040.1)
  Signal Layer 2 w10: v1(5006.36,4202.88) 5006.36,4188.63 5039.68,4155.31 5039.68,4133.35 5016.79,4110.47 v1(5016.79,4040.1)
  Bottom Layer w10: P1.6@4432.32,4672.73 4432.32,4781.66 4456.72,4806.06 4457.4,4806.06 4474.98,4823.63 4474.98,4824.32 4492.55,4841.89 4697.68,4841.89 4958.82,4580.75 4958.82,4250.42 v1(5006.36,4202.88) v1@5007.91,4201.33
JTAG_TMS: P1.2 R23.1 U2.64 | length 1687.7
  Top Layer w10: R23.1@4243.71,4619.58 4243.71,4734.97 4319.79,4811.06 4487.49,4811.06 v1(4533.53,4765.01) ; U2.64@4508.27,4170.25 4800.51,4170.25 v1(4882.67,4252.4)
  Bottom Layer w10: v1(4533.53,4765.01) 4533.53,4673.94 P1.2@4532.32,4672.73 4778.41,4672.73 4908.15,4542.99 4908.15,4277.89 v1(4882.67,4252.4)
LC1_EN: IC8.3 U2.16 | length 879.8
  Top Layer w10: v1(3860.94,4219.14) 4041.33,4219.14 4071.18,4248.99 U2.16@4134.25,4248.99
  Bottom Layer w10: IC8.3@3413.2,3936.51 3413.2,3984.03 3649.37,4220.2 3860.94,4220.2 v1(3860.94,4219.14)
LC1_GATE: IC8.18 T16.4 | length 972.8
  Top Layer w10: v1(3536.7,2889.58) 3563.96,2862.31 T16.4@3563.96,2696.16
  Signal Layer 2 w10: v1(3360.11,3468.06) 3360.11,3364.6 3536.7,3188.01 v1(3536.7,2889.58)
  Bottom Layer w10: v1(3360.11,3468.06) 3413.2,3521.15 IC8.18@3413.2,3562.5
LC2_EN: IC8.5 U2.15 | length 1051.5
  Top Layer w10: v1(4102.91,4299.84) 4105.86,4299.84 4124.82,4318.8 4141.8,4318.8 4153.94,4306.67 U2.15@4153.94,4248.99
  Signal Layer 2 w10: v1(3815.29,4180.21) 3815.29,4237.45 3986.14,4408.3 4003.25,4408.3 4076.41,4335.15 4076.41,4322.28 4098.84,4299.84 v1(4102.91,4299.84)
  Bottom Layer w10: IC8.5@3513.2,3936.51 3539.88,3963.2 3539.88,4063.54 3656.55,4180.21 v1(3815.29,4180.21)
LC2_GATE: IC8.16 T15.4 | length 1811.2
  Top Layer w10: v1(3810.6,3242.8) 3834.96,3242.8 3916.21,3161.56 v1(4181.33,3161.56) ; v1(4632.68,2803.32) 4700.58,2735.42 T15.4@4700.58,2682.38
  Signal Layer 1 w10: v1(3572.2,3413.74) 3664.02,3413.74 3810.6,3267.17 v1(3810.6,3242.8)
  Signal Layer 2 w10: v1(4181.33,3161.56) 4181.33,2886.09 4264.1,2803.32 v1(4632.68,2803.32)
  Bottom Layer w10: IC8.16@3513.2,3562.5 3513.2,3472.75 v1(3572.2,3413.74)
LC3_EN: IC8.7 U2.14 | length 1079.8
  Top Layer w10: v1(4102.91,4345.7) 4152.48,4345.7 4173.62,4324.55 U2.14@4173.62,4248.99
  Signal Layer 2 w10: v1(3768.87,4115.68) 3768.87,4214.36 3979.31,4424.8 4037.39,4424.8 4102.91,4359.28 v1(4102.91,4345.7)
  Bottom Layer w10: IC8.7@3613.2,3936.51 3613.2,4113.52 3652.3,4152.63 3731.93,4152.63 v1(3768.87,4115.68)
LC3_GATE: IC8.14 T14.4 | length 1411.8
  Top Layer w10: v1(3612.51,3375.95) 3700.17,3375.95 3768.87,3444.65 v1(3847.03,3444.65) ; v1(3982.15,2986.09) 4012.62,2986.09 T14.4@4307.47,2691.24
  Signal Layer 2 w10: v1(3847.03,3444.65) 3982.15,3309.53 v1(3982.15,2986.09)
  Bottom Layer w10: v1(3612.51,3375.95) 3613.2,3376.64 IC8.14@3613.2,3562.5
LC4_EN: IC8.9 U2.13 | length 966.1
  Top Layer w10: v1(4113.06,4391.55) 4121.51,4400 4193.31,4328.2 U2.13@4193.31,4248.99
  Signal Layer 2 w10: v1(3720.82,4108.9) 3720.82,4189.64 3972.47,4441.3 4044.22,4441.3 4093.97,4391.55 v1(4113.06,4391.55)
  Bottom Layer w10: IC8.9@3713.2,3936.51 3713.2,4101.28 v1(3720.82,4108.9)
LC4_GATE: IC8.12 T13.4 | length 963.9
  Top Layer w10: v1(3764.56,2925.89) 3764.56,2914.04 3943.03,2735.57 T13.4@3943.03,2696.16
  Signal Layer 2 w10: v1(3712.2,3444.65) 3714.84,3444.65 3764.56,3394.93 v1(3764.56,2925.89)
  Bottom Layer w10: v1(3712.2,3444.65) 3712.2,3561.51 IC8.12@3713.2,3562.5
LC5_EN: IC7.3 U2.12 | length 2076.2
  Top Layer w10: v1(4076,4447) 4097.85,4447 4212.99,4331.85 U2.12@4212.99,4248.99
  Signal Layer 2 w10: v1(3930.71,3575.69) 3685.76,3820.64 3685.76,4177.93 3965.64,4457.8 4065.42,4457.8 4076.23,4447 v1(4076,4447)
  Bottom Layer w10: v1(3930.71,3575.69) 3979.23,3527.17 4362.14,3527.17 4435.93,3453.38 IC7.3@4435.93,3415.36
LC5_GATE: IC7.18 T12.4 | length 2614.8
  Top Layer w10: T12.4@4090.01,577.07 4098.73,577.07 v1(4174.04,652.38)
  Signal Layer 1 w10: v1(4174.04,652.38) 4174.04,2333.68 4235.33,2394.97 v1(4233.82,2394.97) ; v1(4253.13,2511.01) 4276.74,2534.61 4276.74,2763.77 v1(4435.93,2922.96)
  Bottom Layer w10: v1(4233.82,2394.97) 4233.82,2491.07 4253.13,2510.39 v1(4253.13,2511.01) ; v1(4435.93,2922.96) IC7.18@4435.93,3041.34
LC6_EN: IC7.5 U2.11 | length 2301
  Top Layer w10: v1(4105,4474) 4106.74,4474 4232.68,4348.07 U2.11@4232.68,4248.99
  Signal Layer 2 w10: v1(4105,4474) 4104.7,4474.3 3958.81,4474.3 3669.26,4184.76 3669.26,3796.53 3939.2,3526.59 v1(4516,3526.59)
  Bottom Layer w10: v1(4516,3526.59) 4535.93,3506.66 IC7.5@4535.93,3415.36
LC6_GATE: IC7.16 T11.4
LC7_EN: IC7.7 U2.2 | length 1277.4
  Top Layer w10: U2.2@4409.84,4248.99 4409.84,4288.79 4425.72,4304.67 4539.63,4304.67 v1(4573.28,4271.02)
  Signal Layer 1 w10: v1(4635.93,3547.63) v1(4635.93,3754.66)
  Bottom Layer w10: v1(4573.28,4271.02) 4572.83,4271.02 4520.69,4218.88 4506.55,4218.88 4429.52,4141.85 4429.52,3885.29 4494.58,3820.23 4570.36,3820.23 v1(4635.93,3754.66) ; IC7.7@4635.93,3415.36 v1(4635.93,3547.63)
LC7_GATE: IC7.14 T10.4 | length 2588.1
  Top Layer w10: T10.4@4470.59,577.07 4542.73,649.21 v1(4542.73,654)
  Signal Layer 1 w10: v1(4542.73,654) 4542.73,2304.58 4623.29,2385.13 v1(4623.29,2388.81)
  Bottom Layer w10: v1(4623.29,2388.81) 4623.29,2506.42 4648.31,2531.45 4648.31,2741.88 4702.74,2796.31 4702.74,2885.95 4635.93,2952.76 IC7.14@4635.93,3041.34
LC8_EN: IC7.9 U2.1 | length 1174.4
  Top Layer w10: U2.1@4429.53,4248.99 4508.16,4248.99 v1(4508.27,4248.88)
  Signal Layer 1 w10: v1(4572.83,3750.46) 4583.96,3739.34 v1(4583.96,3589.7)
  Bottom Layer w10: v1(4508.27,4248.88) 4409.52,4150.14 4409.52,3877 4536.06,3750.46 v1(4572.83,3750.46) ; v1(4583.96,3589.7) 4693.93,3589.7 4735.93,3547.7 IC7.9@4735.93,3415.36
LC8_GATE: IC7.12 T9.4 | length 3262.4
  Top Layer w10: T9.4@3709.44,577.07 3779.02,646.65 v1(3779.02,655.81)
  Signal Layer 1 w10: v1(3779.02,655.81) 3779.02,2300.17 v1(3872.74,2393.89) ; v1(3889.31,2516.29) 3910.73,2537.71 3910.73,2753.25 4032.58,2875.09 4061.64,2875.09 v1(4066.12,2870.62)
  Signal Layer 2 w10: v1(4437.25,2872.86) 4660.62,2872.86 v1(4735.93,2948.17)
  Bottom Layer w10: v1(3872.74,2393.89) 3872.74,2499.72 v1(3889.31,2516.29) ; v1(4066.12,2870.62) 4435.01,2870.62 v1(4437.25,2872.86) ; v1(4735.93,2948.17) IC7.12@4735.93,3041.34